# Altium PCB auto switch electric bike charger_PCB.PcbDoc
Units mil, origin at the board's own origin, x right, y up, seen from the top; angles counter-clockwise.
Board outline 5122.14 x 2990.03 mil, 2 copper layers (Top Layer, Bottom Layer); 11 components, 26 nets, 115 pads, 0 vias.
Unrouted connection lines stored in the file: 4.
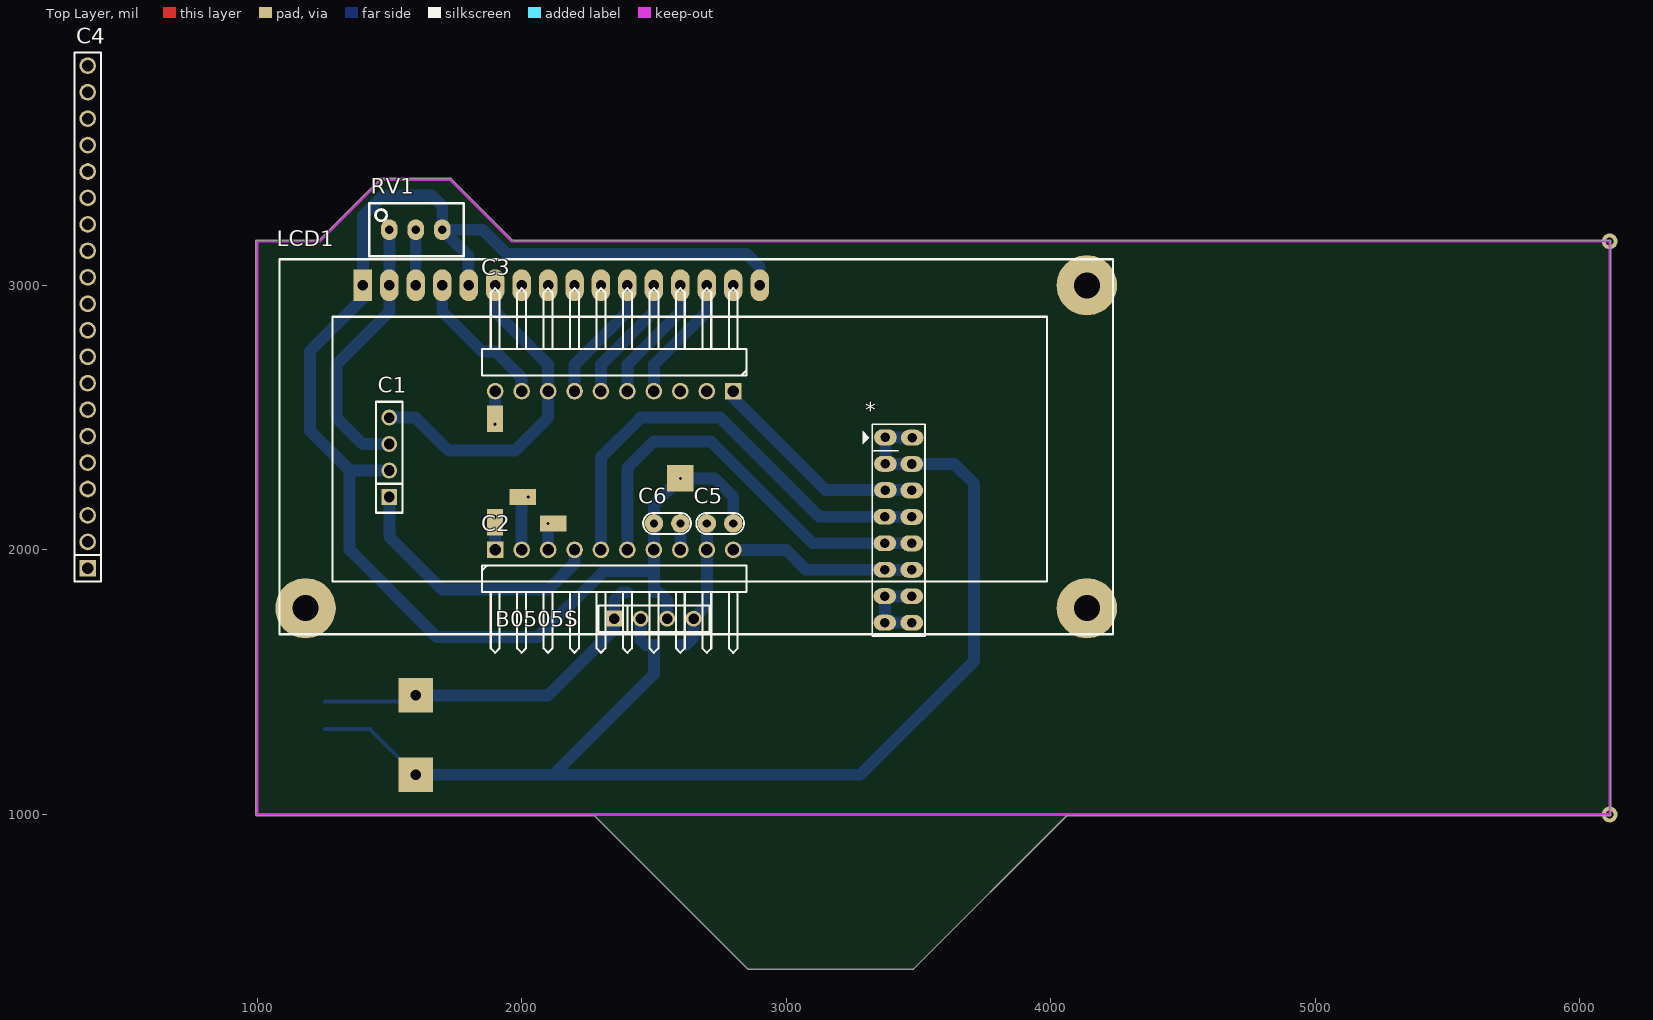
[diagram p0: Top Layer view]
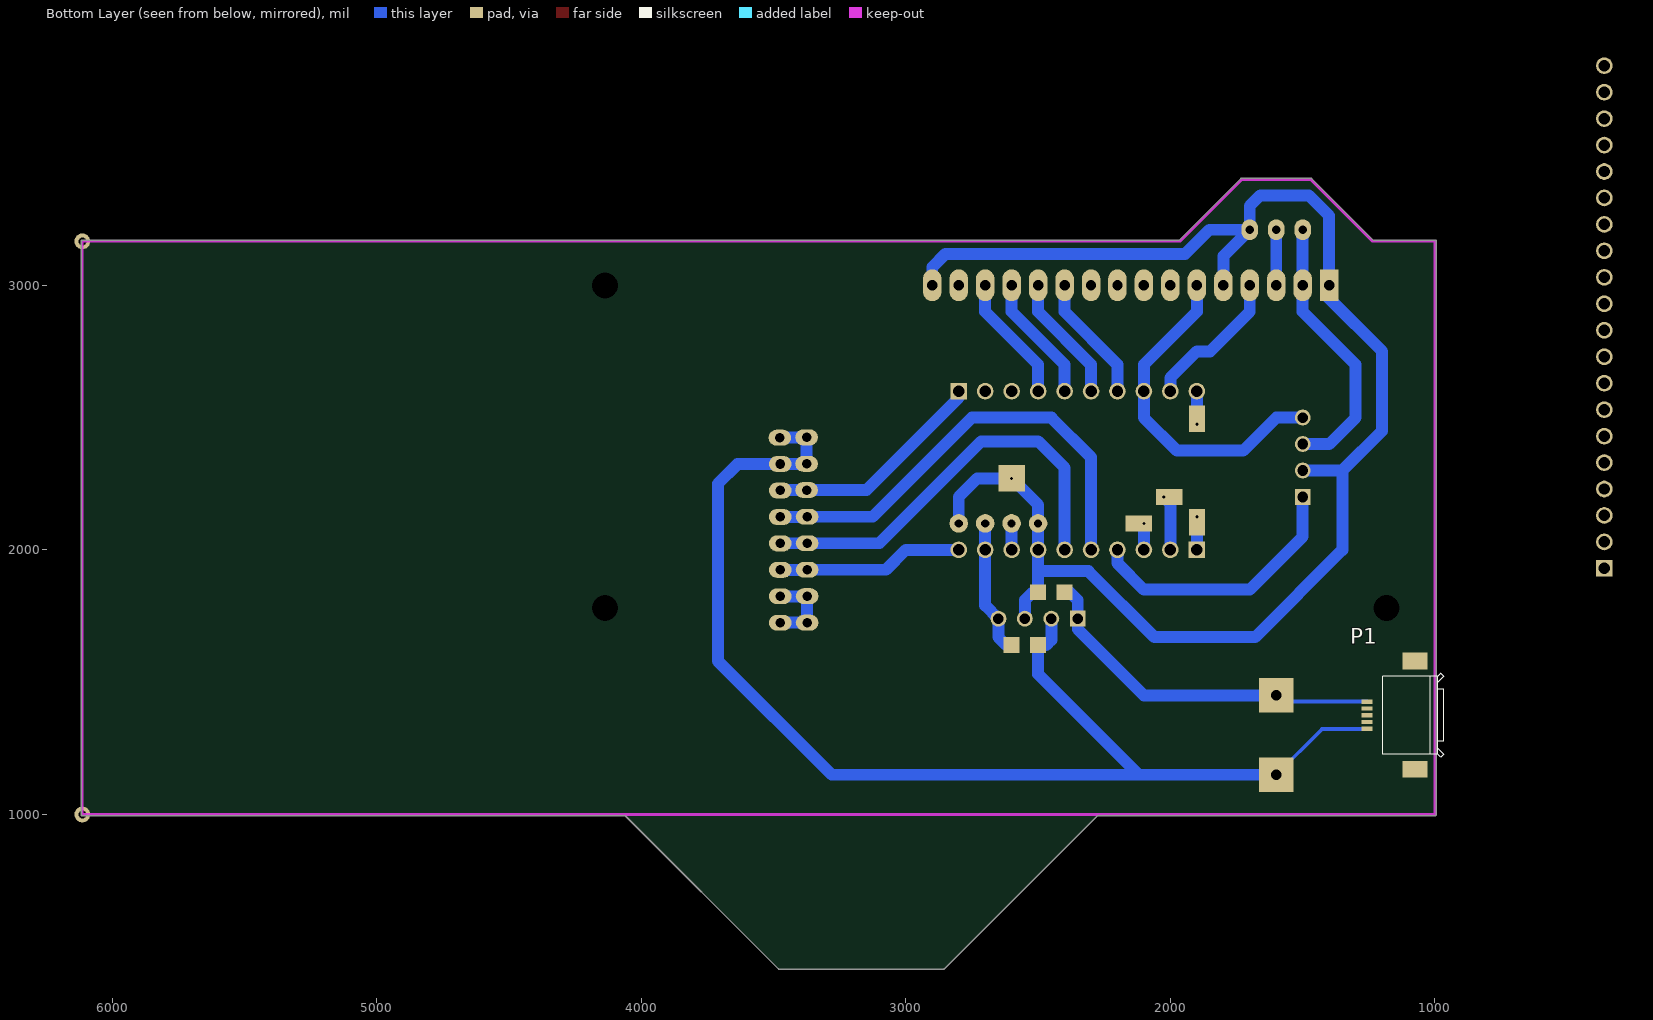
[diagram p1: Bottom Layer view, seen from below]
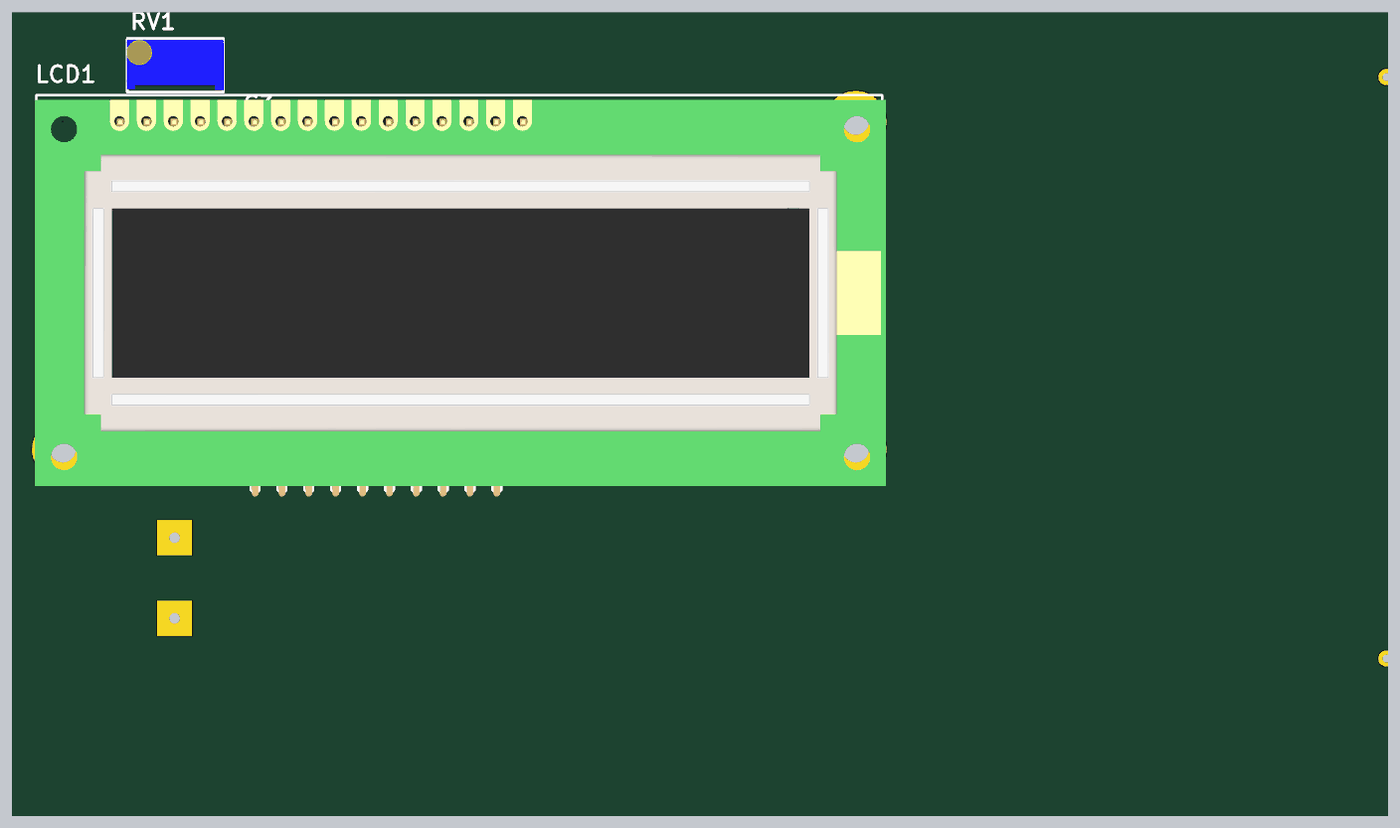
[diagram p2: 3D render of the assembled board from above, using the file's embedded part models]

## Layer stack, top to bottom
Top Solder: solder mask 0.4, Solder Resist, Dk 3.5
Top Layer: signal copper 1.4
Dielectric 1: dielectric 12.6, FR-4, Dk 4.8
Bottom Layer: signal copper 1.4
Bottom Solder: solder mask 0.4, Solder Resist, Dk 3.5

## Board outline
1000,994.99 cw(c1000,1000) 994.99,1000 994.99,3166 cw(c1000,3166) 1000,3171.01 1233.92,3171.01 1466.45,3403.55 1466.44,3403.53 cw(c1470,3400) 1470,3405.01 1730,3405.01 cw(c1730,3400) 1733.56,3403.53 1733.55,3403.55 1966.08,3171.01 6112.11,3171.01 cw(c6112.11,3166) 6117.13,3166 6117.13,1000 cw(c6112.11,1000) 6112.11,994.99 4060.08,994.99 3481.55,416.45 3481.56,416.47 cw(c3478,420) 3478,414.99 2858.03,414.99 cw(c2858.03,420) 2854.46,416.47 2854.48,416.45 2275.95,994.99

## Design rules (kind name [scope] priority, off if disabled: settings)
Clearance [All] p1: gap=20 ignorepadtopadclearanceinfootprint=FALSE
PlaneClearance [All] p1: clearance=23
PlaneConnect [All] p1: planeconnectstyle=Direct reliefexpansion=20 reliefentries=4 reliefconductorwidth=10 reliefairgap=10
PolygonConnect [All] p1: connectstyle=Direct reliefconductorwidth=10 reliefentries=4 polygonreliefangle="90 Angle" airgapwidth=10
RoutingVias [All] p1: holewidth=28 width=50 viastyle="Through Hole" minholewidth=28 minwidth=50 maxholewidth=28 maxwidth=50
SolderMaskExpansion [All] p1: expansion=4
Width [All] p1: maxlimit=45 minlimit=15 preferedwidth=30 toplayer_minwidth=25 toplayer_maxwidth=40 minimp=50.000000 maximp=50.000000 favimp=50.000000
28 further rules are at their usual default settings.

## Components (designator, comment, footprint, x,y, rotation, side; value= is the part's Value field where it differs from the comment)
* "JP8X2" JP8X2 3374.5,2424.5 r270 top
B0505S "JP4" JP4-C1T 2350,1740 r0 top
C1 "JP4" JP4-C1T 1500,2200 r90 top
C2 "JP10" JP10-D1C 2850,1900 r0 top
C3 "JP10" JP10-D1C 1850,2700 r180 top
C4 "JP20" JP20-D1T 360,1930 r90 top
C5 "Cap Non-Pol" CN1 2700,2100 r0 top value=100pF
C6 "Cap Non-Pol" CN1 2600,2100 r180 top value=100pF
LCD1 "LCD 16x2A" LCD16X2 1400,3000 r0 top value=LCD16x2A
P1 "ZX62M-B-5P(01)" HRS_ZX62M-B-5P(01) 1125,1375 r90 bottom
RV1 "RV20K" RVAR10K 1600,3210 r0 top

## Footprints (in the part's own frame and the unit in brackets; to place one, negate y for a bottom-side part, rotate by r counter-clockwise, add the part's x,y. Pads: shape width x height; smd on the part's side, far side on the other; paste and mask are expansions set on the pad)
CN1 [mil]
  round 70 hole 31: 1(0,0) 2(100,0)
  silkscreen extent -40,-40 141,40, body extent -60,-30 170,37, height 265
HRS_ZX62M-B-5P(01) [mm]
  rect 0.4x1.05 smd: 1(-1.3,3.355) 2(-0.65,3.355) 3(0,3.355) 4(0.65,3.355) 5(1.3,3.355)
  rect 1.6x2.4 smd: S1(5.2,-1.27) S2(-5.2,-1.27)
  rect 0x0 smd: S3(-5.2,3.03) S4(-2.35,5.13) S5(2.35,5.13) S6(5.2,3.03)
  silkscreen extent -4.05,-4.02 4.05,1.83
JP4-C1T [mm] "4 row, straight, gold plating"
  rect 1.52x1.52 hole 1.02: 1(0,0)
  round 1.52 hole 1.02: 2(2.54,0) 3(5.08,0) 4(7.62,0)
  silkscreen extent -1.52,-1.27 9.14,1.27, body extent -1.52,-1.25 9.14,1.25, height 8.51
JP8X2 [mil]
  oval 60x86 hole 36: 1(-0.5,0.5) 2(99.5,0.5) 3(198.5,0.5) 4(299.5,-1.5) 5(399.5,-1.5) 6(499.5,-1.5) 7(599.5,-1.5) 8(699.5,-1.5) 9(0.5,101.5) 10(100,100) 11(200,100) 12(300,100) 13(400,100) 14(500,100) 15(600,100) 16(700,100)
  silkscreen extent -51,-85 750,151, body extent -50,-50 750,150, height 335
JP10-D1C [mm] "10 pins, 1 row, right angled, gold plating"
  rect 1.6x1.6 hole 1.1: 1(-24.13,2.54)
  round 1.6 hole 1.1: 2(-21.59,2.54) 3(-19.05,2.54) 4(-16.51,2.54) 5(-13.97,2.54) 6(-11.43,2.54) 7(-8.89,2.54) 8(-6.35,2.54) 9(-3.81,2.54) 10(-1.27,2.54)
  silkscreen extent -25.4,-7.34 0,1.04, body extent -25.4,-7.52 0,2.84, height 2.55
JP20-D1T [mm] "20 pins, 1 row, straight, gold plating"
  rect 1.6x1.6 hole 1.1: 1(0,0)
  round 1.6 hole 1.1: 2(2.54,0) 3(5.08,0) 4(7.62,0) 5(10.16,0) 6(12.7,0) 7(15.24,0) 8(17.78,0) 9(20.32,0) 10(22.86,0) 11(25.4,0) 12(27.94,0) 13(30.48,0) 14(33.02,0) 15(35.56,0) 16(38.1,0) 17(40.64,0) 18(43.18,0) 19(45.72,0) 20(48.26,0)
  silkscreen extent -1.27,-1.27 49.53,1.27, body extent -1.27,-1.27 49.53,1.27, height 8.54
LCD16X2 [mil] "LCD dipslay 16x2, 16 pin"
  rect 70x120 hole 39.37: 1(0,0)
  oval 70x120 hole 39.37: 2(100,0.02) 3(200,0) 4(300,0) 5(400,0) 6(500,0) 7(600,0) 8(700,0) 9(800,0) 10(900,0) 11(1000,0) 12(1100,0) 13(1200,0) 14(1300,0) 15(1400,0) 16(1500,0)
  round 0 all layers, no hole: M1(-216.54,0)
  round 228.35 / inner round 0 / far side round 0 hole 98.43 unplated: M2(2736.22,0) M3(-216.54,-1220.47) M4(2736.22,-1220.47)
  silkscreen extent -315,-1319 2835,98, body extent -320,-1357 2849,80, height 714
RVAR10K [mm] "Bien tro vi chinh"
  oval 1.6x2 hole 0.8: 1(-2.54,0) 2(0,0) 3(2.54,0)
  silkscreen extent -4.47,-2.54 4.6,2.54, body extent -4.54,-2.4 4.66,2.4, height 12.02

## Part data
B0505S C1: "WR-PHD 2.54 mm Angled Socket Header", Manufacturer="Würth Elektronik eiSos GmbH", partNo=613004143121, ComponentLink1 Description=Manufacturer, ComponentLink1URL=http://www.we-online.com, ComponentLink2 Description=Datasheet, ComponentLink2URL=http://katalog.we-online.de/em/datasheet/6130xx143121.pdf, Created by="Karrer Zheng", Created Date="29 March 2013", NoPins=04
C2 C3: "WR-PHD 2.54 mm Angled Socket Header", Manufacturer="Würth Elektronik eiSos GmbH", partNo=613010143121, ComponentLink1 Description=Manufacturer, ComponentLink1URL=http://www.we-online.com, ComponentLink2 Description=Datasheet, ComponentLink2URL=http://katalog.we-online.de/em/datasheet/6130xx143121.pdf, Created by="Karrer Zheng", Created Date="29 March 2013", NoPins=10
C4: "WR-PHD 2.54 mm Angled Socket Header", Manufacturer="Würth Elektronik eiSos GmbH", partNo=613020143121, ComponentLink1 Description=Manufacturer, ComponentLink1URL=http://www.we-online.com, ComponentLink2 Description=Datasheet, ComponentLink2URL=http://katalog.we-online.de/em/datasheet/6130xx143121.pdf, Created by="Karrer Zheng", Created Date="29 March 2013", NoPins=20
C5 C6: "Capacitor"
LCD1: library part LCD16x2A, "LCD dipslay 16 char, 2 line"
P1: "Conn Rcpt Micro Usb b Mid Mnt", Package=None, Availability=Unavailable, MF=Hirose, MP=ZX62M-B-5P, Price=None, SnapEDA_Link=https://www.snapeda.com/parts/ZX62M-B-5P/Hirose%20Electric%20Co%20Ltd/view-part/?ref=snap
RV1: library part "Variable Resistor", "Variable Resistor", LatestRevisionDate=17-Jul-2002, LatestRevisionNote="Re-released for DXP Platform.", PackageReference=VR5, Published=8-Jun-2000, Publisher="Altium Limited", Set Position=0.5, Sim Note="Enter the Resistance value and the set point into parameter fields."

## Free pads (board coordinates)
  rect 60x60 smd far side: 2(2400,1840) 2(2500,1640) 2(2500,1840) ""(2600,1640)
  rect 130x130 hole 40: 5(1600,1150) 5(1600,1450)
  rect 60x100 hole 11.81 copper offset 0,-20: 5(1900,2125)
  rect 60x100 hole 11.81 copper offset 0,20: 5(1900,2475)
  rect 100x60 hole 11.81 copper offset -20,0: 5(2025,2200)
  rect 100x60 hole 11.81 copper offset 20,0: 5(2100,2100)
  rect 100x100 hole 11.81: 5(2600,2270)
  round 60 hole 30: 7(6112.11,3166) 8(6112.11,1000)

## Nets (pads, with @x,y where several pads share a name; then routed paths per layer and width w, separated by ;. In a path a pad name is that pad's centre, name@x,y a point inside that pad or via, vN(x,y) a via of type N, cw(c..) or ccw(c..) an arc to the next point about the centre after c; other vN are vias at no path point)
0V: B0505S.3 C1.2 C2.7 C5.2 C6.2 LCD1.1 LCD1.5 LCD1.16 pad.2@2500,1840 pad.5@2600,2270 RV1.3 | length 5898
  Bottom Layer w45: C1.2 1350,2300 ; LCD1.5 1800,3110 RV1.3 ; B0505S.3 2550,1810 2520,1840 2500,1840 2500,1920 ; C5.2 2800,2200 2730,2270 2600,2270 2500,2170 C6.2 C2.7 2500,1920 ; LCD1.16 2900,3068.5 2850,3118.5 1944.32,3118.5 1852.82,3210 RV1.3 ; 1350,2300 1350,2000 1680,1670 2060,1670 2310,1920 2500,1920 ; 1350,2300 1200,2450 1200,2750 1400,2950 LCD1.1 1400,3262.82 1477.18,3340 1660,3340 1700,3300 RV1.3
"+220 AC -": 
+Vo: B0505S.4 C1.3 C2.9 C5.1 LCD1.2 LCD1.15 pad. RV1.1 | length 1547.4
  Bottom Layer w45: C1.3 1400,2400 1300,2500 1300,2700 1500,2900 LCD1.2 RV1.1 ; pad. 2620,1640 2650,1670 B0505S.4 2700,1790 C2.9 C5.1
DOWN: C2.1 pad.5@1900,2125 | length 125
  Bottom Layer w45: C2.1 pad.5@1900,2125
GND: *.7 *.8 *.15 *.16 B0505S.1 P1.5 pad.2@2400,1840 pad.5@1600,1450 | length 1682.2
  Bottom Layer w15: P1.5 1576.18,1426.18 pad.5@1600,1450
  Bottom Layer w45: pad.5@1600,1450 2100,1450 2350,1700 B0505S.1 2350,1810 2380,1840 pad.2@2400,1840 ; *.16 3474,1725 *.8 *.7 3373.5,1824.5 *.15
IN1L: *.3 *.11 C3.1 | length 844.7
  Bottom Layer w45: C3.1 2800,2575 2825,2550 3149,2226 *.3 3473,2226 *.11
IN2L: *.4 *.12 C2.5 | length 1742.2
  Bottom Layer w45: C2.5 2300,2350 2450,2500 2750,2500 3125,2125 *.4 3373.5,2124.5 *.12
IN3L: *.5 *.13 C2.6 | length 1585.6
  Bottom Layer w45: C2.6 2400,2310 2500,2410 2715,2410 3100,2025 *.5 3474,2025 *.13
IN4L: *.6 *.14 C2.10 | length 705.8
  Bottom Layer w45: C2.10 3000,2000 3075,1925 *.6 3373.5,1924.5 *.14
LCD_D4: C3.7 LCD1.11 | length 482.8
  Bottom Layer w45: C3.7 2200,2700 2400,2900 LCD1.11
LCD_D5: C3.6 LCD1.12 | length 482.8
  Bottom Layer w45: C3.6 2300,2700 2500,2900 LCD1.12
LCD_D6: C3.5 LCD1.13 | length 482.8
  Bottom Layer w45: C3.5 2400,2700 2600,2900 LCD1.13
LCD_D7: C3.4 LCD1.14 | length 482.8
  Bottom Layer w45: C3.4 2500,2700 2700,2900 LCD1.14
LCD_EN: C1.4 C3.8 LCD1.6 | length 1286.4
  Bottom Layer w45: C1.4 1600,2500 1725,2375 1975,2375 2100,2500 C3.8 2100,2700 1900,2900 LCD1.6
LCD_RS: C3.9 LCD1.4 | length 553.6
  Bottom Layer w45: LCD1.4 1700,2900 1850,2750 1900,2750 2000,2650 C3.9
LEFT: C2.2 pad.5@2025,2200 | length 210.4
  Bottom Layer w45: C2.2 2000,2175 pad.5@2025,2200
NetLCD1_3: LCD1.3 RV1.2 | length 210
  Bottom Layer w45: LCD1.3 RV1.2
NRST: C1.1 C2.4 | length 1024.3
  Bottom Layer w45: C1.1 1500,2050 1700,1850 2100,1850 2200,1950 C2.4
PB4: C3.2
PC3: C3.3
PD3: C3.10 pad.5@1900,2475 | length 125
  Bottom Layer w45: pad.5@1900,2475 C3.10
PD6: C2.3 pad.5@2100,2100 | length 100
  Bottom Layer w45: C2.3 pad.5@2100,2100
VCAP: C2.8 C6.1 | length 100
  Bottom Layer w45: C2.8 C6.1
Vin: *.2 *.10 B0505S.2 P1.1 pad.2@2500,1640 pad.5@1600,1150 | length 4726.2
  Bottom Layer w15: P1.1 1426.18,1323.82 pad.5@1600,1150
  Bottom Layer w45: pad.5@1600,1150 2120,1150 ; B0505S.2 2450,1660 2470,1640 2500,1640 2500,1530 2120,1150 ; 3476,2424 3376,2424 3375,2425 *.2 3474,2325 *.10 3635.5,2324.5 3710,2250 3710,1580 3280,1150 2120,1150
VRL: *.1 *.9
"~220 AC +": 
pads on no net: C4.1 C4.2 C4.3 C4.4 C4.5 C4.6 C4.7 C4.8 C4.9 C4.10 C4.11 C4.12 C4.13 C4.14 C4.15 C4.16 C4.17 C4.18 C4.19 C4.20 LCD1.7 LCD1.8 LCD1.9 LCD1.10 LCD1.M1 LCD1.M2 LCD1.M3 LCD1.M4 P1.2 P1.3 P1.4 P1.S1 P1.S2 P1.S3 P1.S4 P1.S5 P1.S6

## Keep-outs
Keep-Out Layer:
  lines w10: 1000,1000 2278.03,1000 4058,1000 6112.11,1000 6112.11,3166 1964,3166 1730,3400 1470,3400 1236,3166 1000,3166 1000,1000